# EAGLE board DSP_Lab_SS21_Keyboard_panelized (EAGLE 9.5.2)
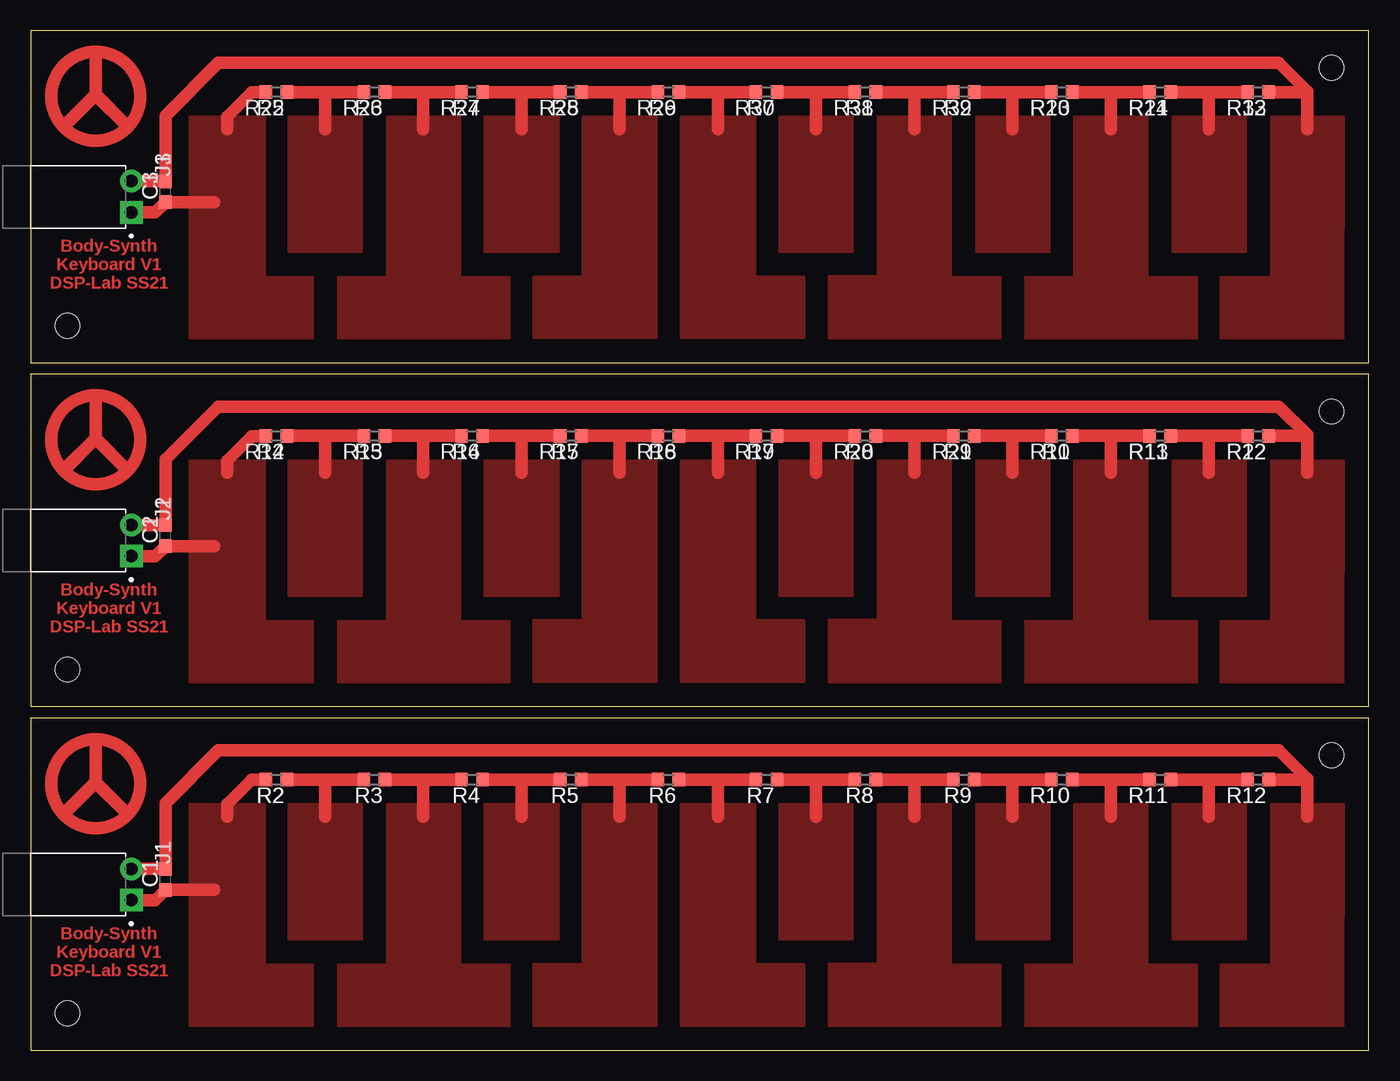
[diagram p0: board, top side]

Size 109.02 x 83.03 mm. Coordinates in mm from the lower left corner, seen from the top.
Outline: 0,0 109.02,0 109.02,27.03 0,27.03 0,0
Outline: 0,28 109.02,28 109.02,55.03 0,55.03 0,28
Outline: 0,56 109.02,56 109.02,83.03 0,83.03 0,56
Copper layers (1*16): Top 0.035mm / dielectric 1.5mm / Bottom 0.035mm
Design rules "Projektlabor_THT_DRC_2019": minimum track width 0.8mm, minimum drill 0.6mm, track to track 15mil, track to pad 12mil, pad to pad 16mil, via to via 20mil, smd to smd 8mil, copper to edge 40mil, drill to drill 16mil, minimum pad ring 16mil, minimum via ring 14mil, stop-mask expansion 4mil, vias tented up to drill 0mil, thermal gap 15mil
Holes 2 mm at 2.99,3.01 105.99,24.01 2.99,31.01 105.99,52.01 2.99,59.01 105.99,80.01

## Footprints (pad centres in the part's own frame; a part is rotated, then mirrored left to right if it is on the bottom)
C0603 = smd 1.1 x 1: 1 -0.85,0; 2 0.85,0
TE_640455-2 = drill 1.02 pad 1.37 square: 1 0,0 | drill 1.02 pad 1.37: 2 -2.54,0
R0603 = smd 1 x 1.1: 1 -0.85,0; 2 0.85,0

## Placement (x,y rotation side)
C1  [C0603]  10.99,13.91 90 top
C2  [C0603]  10.99,41.91 90 top
C3  [C0603]  10.99,69.91 90 top
J1  640455-2  [TE_640455-2]  8.19,12.23 270 top
J2  640455-2  [TE_640455-2]  8.19,40.23 270 top
J3  640455-2  [TE_640455-2]  8.19,68.23 270 top
R1  2.2k  [R0603]  84,50.03 180 top
R2  2.2k  [R0603]  20.02,22.03 180 top
R3  2.2k  [R0603]  28.01,22.03 180 top
R4  2.2k  [R0603]  35.96,22.03 180 top
R5  2.2k  [R0603]  44.01,22.03 180 top
R6  2.2k  [R0603]  51.96,22.03 180 top
R7  2.2k  [R0603]  59.95,22.03 180 top
R8  2.2k  [R0603]  68,22.03 180 top
R9  2.2k  [R0603]  76.02,22.03 180 top
R10  2.2k  [R0603]  84,22.03 180 top
R11  2.2k  [R0603]  92.02,22.03 180 top
R12  2.2k  [R0603]  100.01,22.03 180 top
R13  2.2k  [R0603]  92.02,50.03 180 top
R14  2.2k  [R0603]  20.02,50.03 180 top
R15  2.2k  [R0603]  28.01,50.03 180 top
R16  2.2k  [R0603]  35.96,50.03 180 top
R17  2.2k  [R0603]  44.01,50.03 180 top
R18  2.2k  [R0603]  51.96,50.03 180 top
R19  2.2k  [R0603]  59.95,50.03 180 top
R20  2.2k  [R0603]  68,50.03 180 top
R21  2.2k  [R0603]  76.02,50.03 180 top
R22  2.2k  [R0603]  100.01,50.03 180 top
R23  2.2k  [R0603]  84,78.03 180 top
R24  2.2k  [R0603]  92.02,78.03 180 top
R25  2.2k  [R0603]  20.02,78.03 180 top
R26  2.2k  [R0603]  28.01,78.03 180 top
R27  2.2k  [R0603]  35.96,78.03 180 top
R28  2.2k  [R0603]  44.01,78.03 180 top
R29  2.2k  [R0603]  51.96,78.03 180 top
R30  2.2k  [R0603]  59.95,78.03 180 top
R31  2.2k  [R0603]  68,78.03 180 top
R32  2.2k  [R0603]  76.02,78.03 180 top
R33  2.2k  [R0603]  100.01,78.03 180 top

## Library data of the parts
C1-C3 = rcl; SPICEPREFIX: C
J1-J3 = 640455-2; AVAILABILITY: Unavailable; COMMENT: 640455-2; DESCRIPTION: MTA-100 2 Position 2.54 mm Single Row Right Angle Wire to Board Header; EU_ROHS_COMPLIANCE: Compliant; MF: TE Connectivity; MP: 640455-2; PACKAGE: None; PRICE: None; TE_PURCHASE_URL: https://www.te.com/usa-en/product-640455-2.html?te_bu=Cor&te_type=disp&te_campaign=seda_glo_cor-seda-global-disp-prtnr-fy19-seda-model-bom-cta_sma-317_1&elqCampaignId=32493
R1-R33 = rcl

## Nets
3V1: C2.2 J2.2 R22.1
3V2: C3.2 J3.2 R33.1
3V3: C1.2 J1.2 R12.1
GND: C1.1 J1.1 R2.2
GND1: C2.1 J2.1 R14.2
GND2: C3.1 J3.1 R25.2
STEP1: R19.1 R20.2
STEP2: R2.1 R3.2
STEP3: R3.1 R4.2
STEP4: R4.1 R5.2
STEP5: R5.1 R6.2
STEP6: R6.1 R7.2
STEP7: R7.1 R8.2
STEP8: R8.1 R9.2
STEP9: R9.1 R10.2
STEP10: R10.1 R11.2
STEP11: R11.1 R12.2
STEP12: R14.1 R15.2
STEP13: R15.1 R16.2
STEP14: R16.1 R17.2
STEP15: R17.1 R18.2
STEP16: R18.1 R19.2
STEP17: R20.1 R21.2
STEP18: R1.2 R21.1
STEP19: R1.1 R13.2
STEP20: R13.1 R22.2
STEP21: R30.1 R31.2
STEP22: R25.1 R26.2
STEP23: R26.1 R27.2
STEP24: R27.1 R28.2
STEP25: R28.1 R29.2
STEP26: R29.1 R30.2
STEP27: R31.1 R32.2
STEP28: R23.2 R32.1
STEP29: R23.1 R24.2
STEP30: R24.1 R33.2

## Tracks (layer width: path | path; a pad name or v marks a point on that pad's centre or on a via)
3V1
  Top 0.813: C2.2
  Top 1.016: R22.1 103.99,50.03 | 103.99,47.01 103.99,50.03 | 103.99,50.03 103.99,50.11 101.69,52.41 15.29,52.41 10.99,48.11 C2.2 | J2.2 C2.2
  pour Top: 101.08,48.01 101.08,34.95 96.97,34.95 96.97,29.97 106.94,29.97 106.99,48.01
3V2
  Top 0.813: C3.2
  Top 1.016: R33.1 103.99,78.03 | 103.99,75.01 103.99,78.03 | 103.99,78.03 103.99,78.11 101.69,80.41 15.29,80.41 10.99,76.11 C3.2 | J3.2 C3.2
  pour Top: 101.08,76.01 101.08,62.95 96.97,62.95 96.97,57.97 106.94,57.97 106.99,76.01
3V3
  Top 0.813: C1.2
  Top 1.016: R12.1 103.99,22.03 | 103.99,19.01 103.99,22.03 | 103.99,22.03 103.99,22.11 101.69,24.41 15.29,24.41 10.99,20.11 C1.2 | J1.2 C1.2
  pour Top: 101.08,20.01 101.08,6.95 96.97,6.95 96.97,1.97 106.94,1.97 106.99,20.01
GND
  Top 1.016: J1.1 10.16,12.23 C1.1 14.94,13.06 | R2.2 19.15,22.01 17.99,22.01 15.99,20.01 15.99,19.01
  pour Top: 12.97,20.01 12.97,1.97 22.96,1.97 22.96,6.95 19.05,6.95 19.05,20.01
GND1
  Top 1.016: J2.1 10.16,40.23 C2.1 14.94,41.06 | R14.2 19.15,50.01 17.99,50.01 15.99,48.01 15.99,47.01
  pour Top: 12.97,48.01 12.97,29.97 22.96,29.97 22.96,34.95 19.05,34.95 19.05,48.01
GND2
  Top 1.016: J3.1 10.16,68.23 C3.1 14.94,69.06 | R25.2 19.15,78.01 17.99,78.01 15.99,76.01 15.99,75.01
  pour Top: 12.97,76.01 12.97,57.97 22.96,57.97 22.96,62.95 19.05,62.95 19.05,76.01
STEP1
  Top 1.016: R19.1 63.99,50.03 | 63.99,47.01 63.99,50.03 | 63.99,50.03 R20.2
  pour Top: 61.02,48.01 61.02,37.02 66.97,37.02 66.97,48.01
STEP2
  Top 1.016: R2.1 23.99,22.03 | 23.99,19.01 23.99,22.03 | 23.99,22.03 R3.2
  pour Top: 21.02,20.01 21.02,9.02 26.97,9.02 26.97,20.01
STEP3
  Top 1.016: R3.1 31.99,22.03 | 31.99,19.01 31.99,22.03 | 31.99,22.03 R4.2
  pour Top: 29.04,20.01 29.04,6.95 25.03,6.95 25.03,1.97 39,1.97 39,6.95 34.99,6.95 34.99,20.01
STEP4
  Top 1.016: R4.1 39.99,22.03 | 39.99,19.01 39.99,22.03 | 39.99,22.03 R5.2
  pour Top: 36.96,20.01 36.96,9.02 43.01,9.02 43.01,20.01
STEP5
  Top 1.016: R5.1 47.99,22.03 | 47.99,19.01 47.99,22.03 | 47.99,22.03 R6.2
  pour Top: 40.99,7.01 44.99,7.01 44.99,20.01 50.99,20.01 50.99,2.01 40.99,2.01
STEP6
  Top 1.016: R6.1 55.99,22.03 | 55.99,19.01 55.99,22.03 | 55.99,22.03 R7.2
  pour Top: 52.99,20.01 52.99,2.01 62.99,2.01 62.99,7.01 58.99,7.01 58.99,20.01
STEP7
  Top 1.016: R7.1 63.99,22.03 | 63.99,19.01 63.99,22.03 | 63.99,22.03 R8.2
  pour Top: 61.02,20.01 61.02,9.02 66.97,9.02 66.97,20.01
STEP8
  Top 1.016: R8.1 71.99,22.03 | 71.99,22.03 R9.2 | 71.99,19.01 71.99,22.03
  pour Top: 69.04,20.01 69.04,7.05 65.03,7.05 65.03,1.97 79,1.97 79,6.95 74.99,6.95 74.99,20.01
STEP9
  Top 1.016: R9.1 79.99,22.03 | 79.99,22.03 R10.2 | 79.99,19.01 79.99,22.03
  pour Top: 77.06,20.01 77.06,9.02 83.01,9.02 83.01,20.01
STEP10
  Top 1.016: R10.1 87.99,22.03 | 87.99,19.01 87.99,22.03 | R11.2 87.99,22.03
  pour Top: 85.04,20.01 85.04,6.95 81.03,6.95 81.03,1.97 95,1.97 95,6.95 90.99,6.95 90.99,20.01
STEP11
  Top 1.016: R11.1 95.99,22.03 | 95.99,22.03 R12.2 | 95.99,19.01 95.99,22.03
  pour Top: 93.06,20.01 93.06,9.02 99.01,9.02 99.01,20.01
STEP12
  Top 1.016: R14.1 23.99,50.03 | 23.99,47.01 23.99,50.03 | 23.99,50.03 R15.2
  pour Top: 21.02,48.01 21.02,37.02 26.97,37.02 26.97,48.01
STEP13
  Top 1.016: R15.1 31.99,50.03 | 31.99,47.01 31.99,50.03 | 31.99,50.03 R16.2
  pour Top: 29.04,48.01 29.04,34.95 25.03,34.95 25.03,29.97 39,29.97 39,34.95 34.99,34.95 34.99,48.01
STEP14
  Top 1.016: R16.1 39.99,50.03 | 39.99,47.01 39.99,50.03 | 39.99,50.03 R17.2
  pour Top: 36.96,48.01 36.96,37.02 43.01,37.02 43.01,48.01
STEP15
  Top 1.016: R17.1 47.99,50.03 | 47.99,47.01 47.99,50.03 | 47.99,50.03 R18.2
  pour Top: 40.99,35.01 44.99,35.01 44.99,48.01 50.99,48.01 50.99,30.01 40.99,30.01
STEP16
  Top 1.016: R18.1 55.99,50.03 | 55.99,47.01 55.99,50.03 | 55.99,50.03 R19.2
  pour Top: 52.99,48.01 52.99,30.01 62.99,30.01 62.99,35.01 58.99,35.01 58.99,48.01
STEP17
  Top 1.016: R20.1 71.99,50.03 | 71.99,50.03 R21.2 | 71.99,47.01 71.99,50.03
  pour Top: 69.04,48.01 69.04,35.05 65.03,35.05 65.03,29.97 79,29.97 79,34.95 74.99,34.95 74.99,48.01
STEP18
  Top 1.016: R21.1 79.99,50.03 | 79.99,50.03 R1.2 | 79.99,47.01 79.99,50.03
  pour Top: 77.06,48.01 77.06,37.02 83.01,37.02 83.01,48.01
STEP19
  Top 1.016: R1.1 87.99,50.03 | 87.99,47.01 87.99,50.03 | R13.2 87.99,50.03
  pour Top: 85.04,48.01 85.04,34.95 81.03,34.95 81.03,29.97 95,29.97 95,34.95 90.99,34.95 90.99,48.01
STEP20
  Top 1.016: R13.1 95.99,50.03 | 95.99,50.03 R22.2 | 95.99,47.01 95.99,50.03
  pour Top: 93.06,48.01 93.06,37.02 99.01,37.02 99.01,48.01
STEP21
  Top 1.016: R30.1 63.99,78.03 | 63.99,75.01 63.99,78.03 | 63.99,78.03 R31.2
  pour Top: 61.02,76.01 61.02,65.02 66.97,65.02 66.97,76.01
STEP22
  Top 1.016: R25.1 23.99,78.03 | 23.99,75.01 23.99,78.03 | 23.99,78.03 R26.2
  pour Top: 21.02,76.01 21.02,65.02 26.97,65.02 26.97,76.01
STEP23
  Top 1.016: R26.1 31.99,78.03 | 31.99,75.01 31.99,78.03 | 31.99,78.03 R27.2
  pour Top: 29.04,76.01 29.04,62.95 25.03,62.95 25.03,57.97 39,57.97 39,62.95 34.99,62.95 34.99,76.01
STEP24
  Top 1.016: R27.1 39.99,78.03 | 39.99,75.01 39.99,78.03 | 39.99,78.03 R28.2
  pour Top: 36.96,76.01 36.96,65.02 43.01,65.02 43.01,76.01
STEP25
  Top 1.016: R28.1 47.99,78.03 | 47.99,75.01 47.99,78.03 | 47.99,78.03 R29.2
  pour Top: 40.99,63.01 44.99,63.01 44.99,76.01 50.99,76.01 50.99,58.01 40.99,58.01
STEP26
  Top 1.016: R29.1 55.99,78.03 | 55.99,75.01 55.99,78.03 | 55.99,78.03 R30.2
  pour Top: 52.99,76.01 52.99,58.01 62.99,58.01 62.99,63.01 58.99,63.01 58.99,76.01
STEP27
  Top 1.016: R31.1 71.99,78.03 | 71.99,78.03 R32.2 | 71.99,75.01 71.99,78.03
  pour Top: 69.04,76.01 69.04,63.05 65.03,63.05 65.03,57.97 79,57.97 79,62.95 74.99,62.95 74.99,76.01
STEP28
  Top 1.016: R32.1 79.99,78.03 | 79.99,78.03 R23.2 | 79.99,75.01 79.99,78.03
  pour Top: 77.06,76.01 77.06,65.02 83.01,65.02 83.01,76.01
STEP29
  Top 1.016: R23.1 87.99,78.03 | 87.99,75.01 87.99,78.03 | R24.2 87.99,78.03
  pour Top: 85.04,76.01 85.04,62.95 81.03,62.95 81.03,57.97 95,57.97 95,62.95 90.99,62.95 90.99,76.01
STEP30
  Top 1.016: R24.1 95.99,78.03 | 95.99,78.03 R33.2 | 95.99,75.01 95.99,78.03
  pour Top: 93.06,76.01 93.06,65.02 99.01,65.02 99.01,76.01
(copper drawn outside any net)
  shapes: Top area x9, Top circle x3

## Text on the board
Top: Body-Synth / Keyboard V1 / DSP-Lab SS21 | Body-Synth / Keyboard V1 / DSP-Lab SS21 | Body-Synth / Keyboard V1 / DSP-Lab SS21
_tNames: R2 | R3 | R4 | R5 | R6 | R7 | R8 | R9 | R10 | R11 | R12 | J1 | C1 | R2 | R3 | R4 | R5 | R6 | R7 | R8 | R9 | R10 | R11 | R12 | J1 | C1 | R2 | R3 | R4 | R5 | R6 | R7 | R8 | R9 | R10 | R11 | R12 | J1 | C1